# Altium PCB mach nhan tin hieu.PcbDoc (part 2 of 2)
Units mm, origin at the board's own origin, x right, y up, seen from the top; angles counter-clockwise.
Board outline 399.55 x 164.38 mm, 2 copper layers (Top Layer, Bottom Layer); 171 components, 209 nets, 595 pads, 30 vias.
Unrouted connection lines stored in the file: 1.
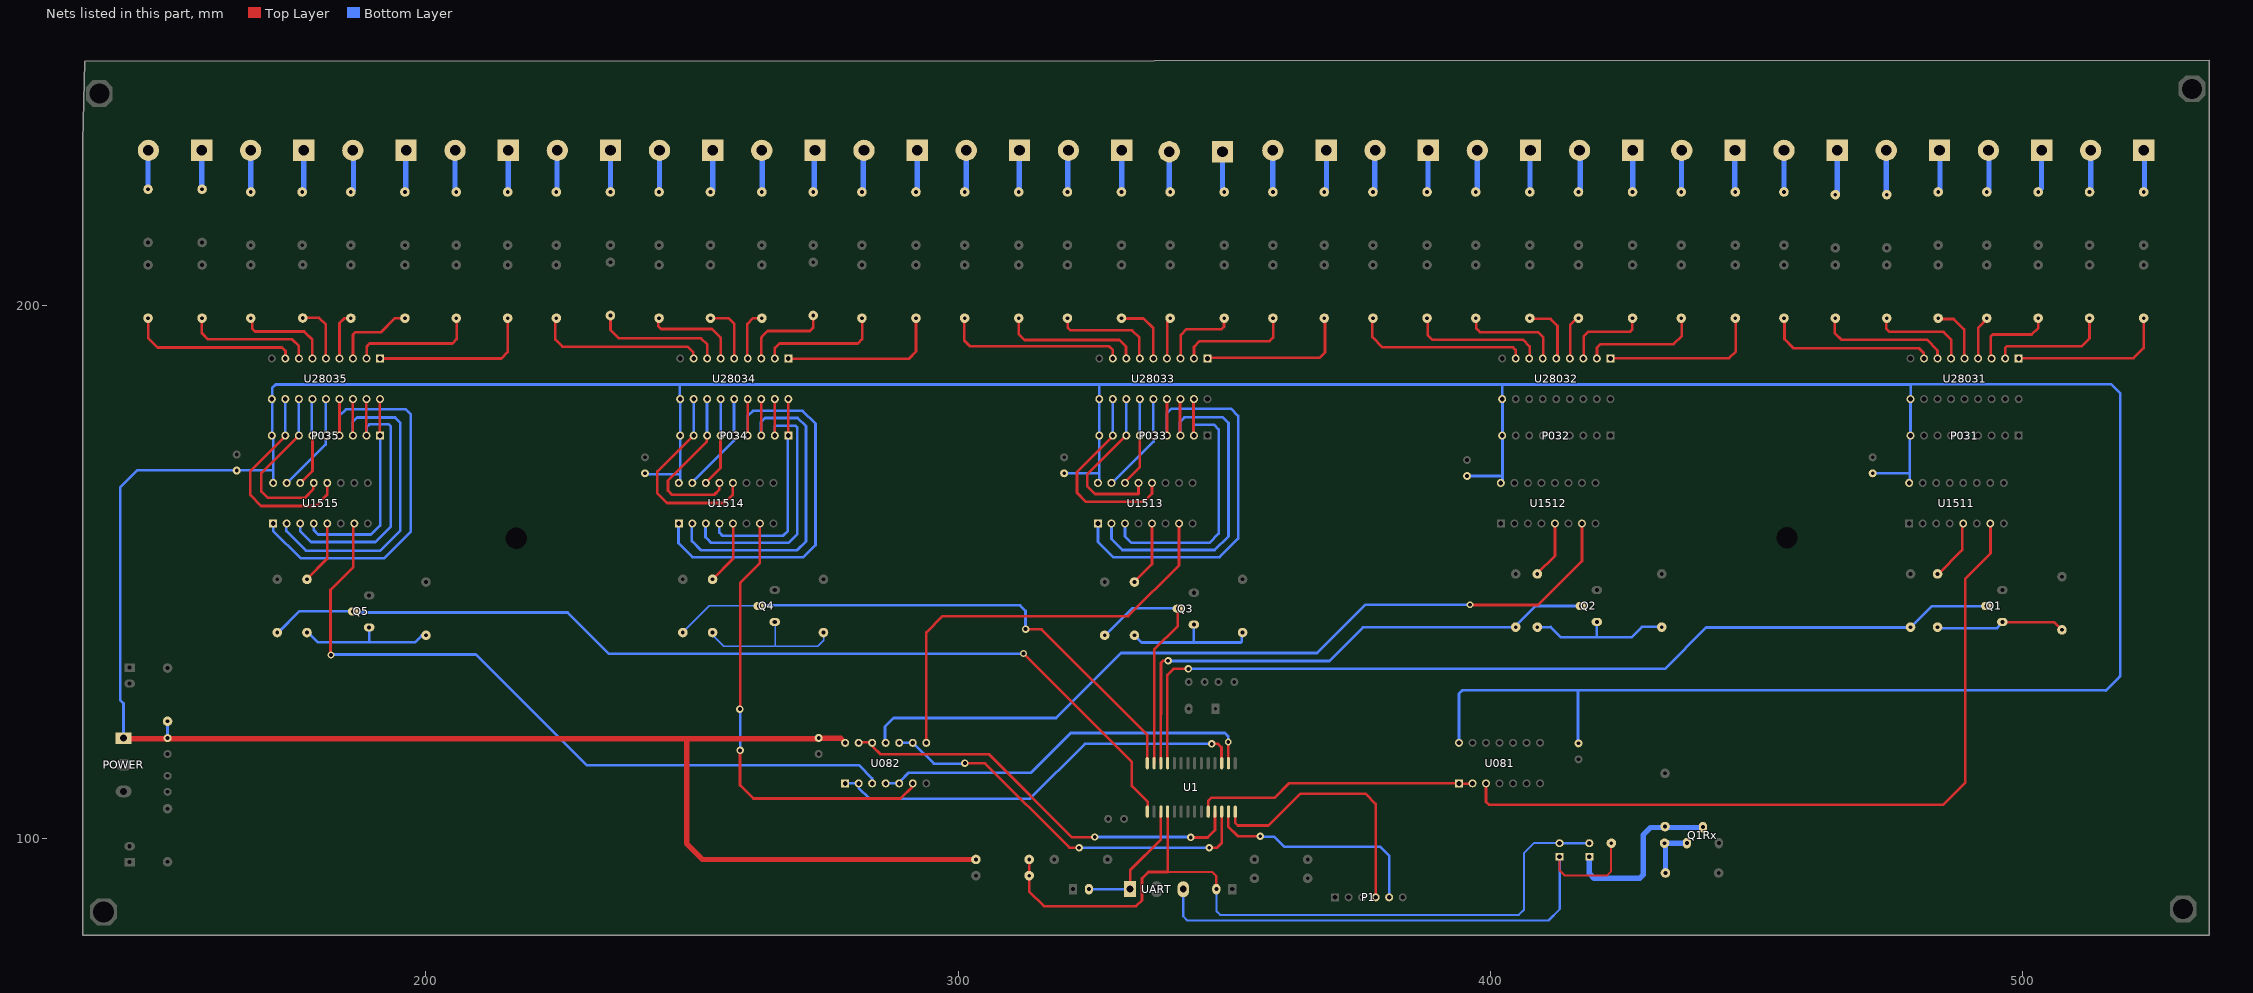
[diagram p2: the nets of this part, all layers, seen from the top]

## Via types
v1: diameter 1.4, hole 0.711, Top Layer to Bottom Layer, 20 vias
v2: diameter 1.27, hole 0.711, Top Layer to Bottom Layer, 9 vias
v3: diameter 1.4, hole 0.72, Top Layer to Bottom Layer, 1 vias

## Nets (pads, with @x,y where several pads share a name; then routed paths per layer and width w, separated by ;. In a path a pad name is that pad's centre, name@x,y a point inside that pad or via, vN(x,y) a via of type N, cw(c..) or ccw(c..) an arc to the next point about the centre after c; other vN are vias at no path point) (continued)
NetP033_2: P033.2 U1513.3 U28033.17 | length 54.9
  Top Layer w0.5: P033.2@344.225,175.675 344.225,182.497 U28033.17@344.225,182.725
  Bottom Layer w0.5: U1513.3@331.362,159.129 331.362,156.688 332.55,155.5 347.225,155.5 348.975,157.25 348.975,176.8 348.075,177.7 344.375,177.7 344.225,177.55 P033.2@344.225,175.675
NetP033_3: P033.3 U1513.2 U28033.16 | length 67.8
  Top Layer w0.254: P033.3@341.7,175.55 P033.3@341.775,175.475
  Top Layer w0.5: P033.3@341.7,175.55 341.7,175.639 341.7,182.497 U28033.16@341.7,182.725
  Bottom Layer w0.5: U1513.2@328.822,159.129 328.822,156.203 330.875,154.15 348.225,154.15 350.8,156.725 350.8,178.025 349.725,179.1 342.537,179.1 342.516,179.05 ; P033.3@341.7,175.55 341.7,175.639 341.7,178.2 342.425,178.925
NetP033_4: P033.4 U1513.1 U28033.15 | length 81
  Top Layer w0.5: P033.4@339.25,175.725 339.25,182.497 U28033.15@339.25,182.7
  Bottom Layer w0.5: U1513.1@326.282,159.129 326.282,155.668 329.15,152.8 349.125,152.8 352.625,156.3 352.625,179.325 351.25,180.7 340.05,180.7 ; P033.4@339.236,175.639 339.236,179.861 340.062,180.687
NetP033_5: P033.5 U1513.15 U28033.14 | length 19
  Bottom Layer w0.254: P033.5@336.625,175.675 336.643,175.693 P033.5@336.696,175.746
  Bottom Layer w0.5: U1513.15@329.05,166.8 336.75,174.5 336.75,175.639 P033.5@336.75,175.725 ; P033.5@336.696,175.746 U28033.14@336.696,182.497
NetP033_6: P033.6 U1513.14 U28033.13 | length 16.8
  Top Layer w0.5: U1513.14@331.25,166.85 331.255,166.855 334.156,169.756 P033.6@334.156,175.639
  Bottom Layer w0.254: P033.6@334.075,175.75 P033.6@334.156,175.831
  Bottom Layer w0.5: P033.6@334.156,175.831 U28033.13@334.156,182.497
NetP033_7: P033.7 U1513.13 U28033.12 | length 31.7
  Top Layer w0.5: P033.7@331.6,175.675 331.59,175.665 324.25,168.325 324.25,166.2 325.775,164.675 333.902,164.675 U1513.13@333.902,166.749
  Bottom Layer w0.254: P033.7@331.616,175.784 331.688,175.712 P033.7@331.725,175.675
  Bottom Layer w0.5: P033.7@331.616,175.784 U28033.12@331.616,182.497
NetP033_8: P033.8 U1513.12 U28033.11 | length 37.5
  Top Layer w0.5: P033.8@329.05,175.5 322.35,168.8 322.35,164.9 324.05,163.2 334.9,163.2 336.442,164.742 U1513.12@336.442,166.749
  Bottom Layer w0.254: U28033.11@329,182.325 U28033.11@329.076,182.249
  Bottom Layer w0.5: P033.8@329.076,175.639 U28033.11@329.076,182.249
NetP034_1: P034.1 U1514.4 U28034.18 | length 40.1
  Top Layer w0.254: P034.1@268.1,175.575 P034.1@268.116,175.591
  Top Layer w0.5: P034.1@268.116,175.591 P034.1@268.116,175.639 U28034.18@268.116,182.497
  Bottom Layer w0.5: U1514.4@255.162,159.275 U1514.4@255.162,159.129 255.162,157.438 255.775,156.825 267.1,156.825 268.025,157.75 268.025,175.5 P034.1@268.1,175.575
NetP034_2: P034.2 U1514.3 U28034.17 | length 54
  Top Layer w0.254: P034.2@265.576,175.599 P034.2@265.75,175.425
  Top Layer w0.5: P034.2@265.576,175.599 P034.2@265.576,175.639 U28034.17@265.576,182.497
  Bottom Layer w0.254: 265.576,177.326 265.725,177.475
  Bottom Layer w0.5: U1514.3@252.55,159.075 252.55,156.55 253.375,155.725 ; 253.45,155.65 253.6,155.5 268.175,155.5 269.8,157.125 269.8,177.15 269.5,177.45 ; P034.2@265.576,175.599 P034.2@265.576,175.639 265.576,177.326 ; 265.725,177.475 269.425,177.475
NetP034_3: P034.3 U1514.2 U28034.16 | length 66.5
  Top Layer w0.254: P034.3@262.95,175.75 P034.3@263.036,175.836
  Top Layer w0.5: P034.3@263.036,175.836 U28034.16@263.036,182.497
  Bottom Layer w0.5: U1514.2@250,159.3 250,159.129 250,155.85 251.75,154.1 269.75,154.1 271.425,155.775 271.425,174.25 ; P034.3@262.975,175.575 262.975,175.639 262.975,178.15 263.775,178.95 269.875,178.95 271.425,177.4 271.425,174.4
NetP034_4: P034.4 U1514.1 U28034.15 | length 79.1
  Top Layer w0.254: P034.4@260.475,175.5 P034.4@260.496,175.521
  Top Layer w0.5: P034.4@260.496,175.521 P034.4@260.496,175.639 U28034.15@260.496,182.497
  Bottom Layer w0.5: U1514.1@247.475,159 247.475,155.425 250.1,152.8 270.95,152.8 273.225,155.075 ; P034.4@260.525,175.575 260.525,175.639 260.525,179.375 261.45,180.3 270.8,180.3 273.225,177.875 273.225,155.075 ; 273.225,155.025 273.225,155.075 ; 273.25,155.1 273.225,155.075
NetP034_5: P034.5 U1514.15 U28034.14 | length 18.9
  Bottom Layer w0.5: U1514.15@249.975,166.75 250.028,166.803 257.925,174.7 257.925,175.639 U28034.14@257.925,182.4
NetP034_6: P034.6 U1514.14 U28034.13 | length 16.9
  Top Layer w0.254: P034.6@255.5,175.425 P034.6@255.6,175.425
  Top Layer w0.5: U1514.14@252.575,166.75 252.598,166.773 255.375,169.55 P034.6@255.375,175.55
  Bottom Layer w0.5: P034.6@255.416,175.616 P034.6@255.416,175.639 U28034.13@255.416,182.497
NetP034_7: P034.7 U1514.13 U28034.12 | length 31.9
  Top Layer w0.5: P034.7@252.825,175.45 252.825,174.5 245.525,167.2 245.525,165.3 246.3,164.525 254.2,164.525 255.162,165.487 U1514.13@255.162,166.749
  Bottom Layer w0.5: P034.7@252.85,175.675 252.85,182.497 U28034.12@252.85,182.8
NetP034_8: P034.8 U1514.12 U28034.11 | length 38.4
  Top Layer w0.5: P034.8@250.375,175.775 250.288,175.687 243.5,168.9 243.5,164.8 245.325,162.975 256.15,162.975 257.65,164.475 U1514.12@257.65,166.65
  Bottom Layer w0.5: P034.8@250.336,175.611 P034.8@250.336,175.639 U28034.11@250.336,182.497
NetP035_1: P035.1 U1515.4 U28035.18 | length 38.3
  Top Layer w0.5: P035.1@191.35,175.625 191.35,175.639 U28035.18@191.35,182.475
  Bottom Layer w0.5: U1515.4@178.962,159.129 178.962,157.863 179.775,157.05 ; 179.875,157.05 189.725,157.05 191.425,158.75 ; 191.433,158.725 P035.1@191.433,175.5
NetP035_2: P035.2 U1515.3 U28035.17 | length 52.8
  Top Layer w0.5: P035.2@188.85,175.6 188.85,175.639 U28035.17@188.85,182.425
  Bottom Layer w0.254: 193.425,177.4 193.45,177.375
  Bottom Layer w0.5: U1515.3@176.422,159.129 176.422,157.678 178.45,155.65 190.575,155.65 193.45,158.525 193.45,177.375 ; P035.2@188.875,175.575 188.875,175.639 188.875,177.225 189.4,177.75 193.075,177.75 193.425,177.4
NetP035_3: P035.3 U1515.2 U28035.16 | length 65.2
  Top Layer w0.5: P035.3@186.275,175.7 U28035.16@186.275,182.45
  Bottom Layer w0.5: U1515.2@173.8,159 173.8,157.725 177.5,154.025 191.475,154.025 195.2,157.75 195.2,178.075 194.25,179.025 187.075,179.025 186.275,178.225 186.275,175.639 P035.3@186.275,175.55
NetP035_4: P035.4 U1515.1 U28035.15 | length 78.2
  Top Layer w0.5: P035.4@183.788,175.662 U28035.15@183.788,182.497
  Bottom Layer w0.254: P035.4@183.75,175.75 183.824,175.676 P035.4@183.85,175.65 ; 197.1,179.725 197.175,179.65
  Bottom Layer w0.5: U1515.1@171.35,159.025 171.35,157.75 176.462,152.638 ; 176.5,152.575 192.2,152.575 197.175,157.55 197.175,179.65 ; P035.4@183.75,175.75 183.75,179.325 185,180.575 196.25,180.575 197.1,179.725
NetP035_5: P035.5 U1515.15 U28035.14 | length 18.9
  Bottom Layer w0.5: U1515.15@173.925,166.675 173.94,166.69 181.2,173.95 181.2,175.639 181.2,182.497 U28035.14@181.2,182.575
NetP035_6: P035.6 U1515.14 U28035.13 | length 16.7
  Top Layer w0.5: U1515.14@176.4,166.675 176.448,166.723 178.725,169 178.725,175.639 P035.6@178.725,175.7
  Bottom Layer w0.5: P035.6@178.6,175.75 U28035.13@178.6,182.425
NetP035_7: P035.7 U1515.13 U28035.12 | length 32.4
  Top Layer w0.5: P035.7@176.15,175.65 169.125,168.625 169.125,165.15 170.325,163.95 177.275,163.95 178.9,165.575 U1515.13@178.9,166.675
  Bottom Layer w0.5: P035.7@176.168,175.507 P035.7@176.168,175.639 U28035.12@176.168,182.497
NetP035_8: P035.8 U1515.12 U28035.11 | length 39
  Top Layer w0.5: P035.8@173.65,175.55 167.05,168.95 167.05,164.45 169.075,162.425 179.35,162.425 181.502,164.577 U1515.12@181.502,166.749
  Bottom Layer w0.5: P035.8@173.628,175.647 U28035.11@173.628,182.497
NetPI1_1: IN1.1 PI1.1 | length 7.4
  Bottom Layer w1: IN1.1@522.9,221.775 PI1.1@522.9,229.2
NetPI1_2: IN2.1 PI1.2 | length 7.6
  Bottom Layer w1: IN2.1@512.78,221.63 PI1.2@512.78,229.221
NetPI2_1: IN3.1 PI2.1 | length 7.3
  Bottom Layer w1: 503.55,222.075 503.55,229.221 PI2.1@503.55,229.4
NetPI2_2: IN4.1 PI2.2 | length 7.9
  Bottom Layer w1: IN4.1@493.675,221.525 493.675,229.221 PI2.2@493.675,229.4
NetPI3_1: IN5.1 PI3.1 | length 7.3
  Bottom Layer w1: IN5.1@484.475,221.775 PI3.1@484.475,229.1
NetPI3_2: IN6.1 PI3.2 | length 8
  Bottom Layer w1: IN6.1@474.372,221.203 PI3.2@474.372,229.221
NetPI4_1: IN7.1 PI4.1 | length 8.1
  Bottom Layer w1: IN7.1@465.168,221.168 PI4.1@465.168,229.221
NetPI4_2: IN8.1 PI4.2 | length 7.7
  Bottom Layer w1: IN8.1@455.168,221.557 PI4.2@455.168,229.221
NetPI5_1: IN9.1 PI5.1 | length 7.9
  Bottom Layer w1: IN9.1@445.925,221.425 445.925,229.221 PI5.1@445.925,229.35
NetPI5_2: IN10.1 PI5.2 | length 7.7
  Bottom Layer w1: IN10.1@435.9,221.625 435.9,229.221 PI5.2@435.9,229.35
NetPI6_1: IN11.1 PI6.1 | length 7.9
  Bottom Layer w1: IN11.1@426.75,221.525 426.75,229.221 PI6.1@426.75,229.4
NetPI6_2: IN12.1 PI6.2 | length 7.6
  Bottom Layer w1: IN12.1@416.875,221.625 416.875,229.221 PI6.2@416.875,229.25
NetPI7_1: IN13.1 PI7.1 | length 7.6
  Bottom Layer w1: IN13.1@407.45,221.675 407.45,229.221 PI7.1@407.45,229.25
NetPI7_2: IN14.1 PI7.2 | length 7.4
  Bottom Layer w1: IN14.1@397.556,221.806 PI7.2@397.556,229.221
NetPI8_1: IN15.1 PI8.1 | length 7.8
  Bottom Layer w1: IN15.1@388.3,221.575 388.3,229.221 PI8.1@388.3,229.35
NetPI8_2: IN16.1 PI8.2 | length 7.8
  Bottom Layer w1: IN16.1@378.275,221.575 378.275,229.221 PI8.2@378.275,229.35
NetPI9_1: IN17.1 PI9.1 | length 7.3
  Bottom Layer w1: IN17.1@369.225,221.975 369.225,229.221 PI9.1@369.225,229.3
NetPI9_2: IN18.1 PI9.2 | length 7.8
  Bottom Layer w1: IN18.1@359.15,221.525 359.15,229.221 PI9.2@359.15,229.35
NetPI10_1: IN19.1 PI10.1 | length 7.3
  Bottom Layer w1: IN19.1@349.675,221.825 349.675,228.967 PI10.1@349.675,229.1
NetPI10_2: IN20.1 PI10.2 | length 7.3
  Bottom Layer w1: IN20.1@339.679,221.646 PI10.2@339.679,228.967
NetPI11_1: IN21.1 PI11.1 | length 7.6
  Bottom Layer w1: IN21.1@330.74,221.64 PI11.1@330.74,229.221
NetPI11_2: IN22.1 PI11.2 | length 7.7
  Bottom Layer w1: IN22.1@320.6,221.625 320.6,229.221 PI11.2@320.6,229.35
NetPI12_1: IN23.1 PI12.1 | length 7.9
  Bottom Layer w1: IN23.1@311.5,221.525 311.5,229.221 PI12.1@311.5,229.45
NetPI12_2: IN24.1 PI12.2 | length 7.3
  Bottom Layer w1: IN24.1@301.535,221.885 PI12.2@301.535,229.221
NetPI13_1: IN25.1 PI13.1 | length 7.6
  Bottom Layer w1: IN25.1@292.331,221.656 PI13.1@292.331,229.221
NetPI13_2: IN26.1 PI13.2 | length 7.6
  Bottom Layer w1: IN26.1@282.175,221.675 282.175,229.221 PI13.2@282.175,229.25
NetPI14_1: IN27.1 PI14.1 | length 7.5
  Bottom Layer w1: IN27.1@273,221.875 273,229.221 PI14.1@273,229.4
NetPI14_2: IN28.1 PI14.2 | length 7.7
  Bottom Layer w1: IN28.1@263.25,221.475 PI14.2@263.25,229.15
NetPI15_1: IN29.1 PI15.1 | length 7.3
  Bottom Layer w1: IN29.1@253.923,221.923 PI15.1@253.923,229.221
NetPI15_2: IN30.1 PI15.2 | length 7.8
  Bottom Layer w1: IN30.1@243.923,221.402 243.923,221.408 PI15.2@243.923,229.221
NetPI16_1: IN31.1 PI16.1 | length 7.8
  Bottom Layer w1: IN31.1@234.719,221.469 PI16.1@234.719,229.221
NetPI16_2: IN32.1 PI16.2 | length 7.8
  Bottom Layer w1: IN32.1@224.65,221.475 224.65,229.221 PI16.2@224.65,229.3
NetPI17_1: IN33.1 PI17.1 | length 7.6
  Bottom Layer w1: IN33.1@215.5,221.7 215.5,229.221 PI17.1@215.5,229.35
NetPI17_2: IN34.1 PI17.2 | length 7.7
  Bottom Layer w1: IN34.1@205.515,221.535 PI17.2@205.515,229.221
NetPI18_1: IN35.1 PI18.1 | length 7.4
  Bottom Layer w1: IN35.1@196.25,221.675 PI18.1@196.25,229.1
NetPI18_2: IN36.1 PI18.2 | length 7.4
  Bottom Layer w1: IN36.1@186.425,221.825 186.425,229.221 PI18.2@186.425,229.25
NetPI19_1: IN37.1 PI19.1 | length 7.6
  Bottom Layer w1: IN37.1@177.1,221.725 177.1,229.221 PI19.1@177.1,229.35
NetPI19_2: IN38.1 PI19.2 | length 7.8
  Bottom Layer w1: IN38.1@167.107,221.408 PI19.2@167.107,229.221
NetPI20_1: IN39.1 PI20.1 | length 7.1
  Bottom Layer w1: IN39.1@157.903,222.097 PI20.1@157.903,229.221
NetPI20_2: IN40.1 PI20.2 | length 7.2
  Bottom Layer w1: IN40.1@147.828,221.916 PI20.2@147.828,229.128
NetQ1_3: Q1.3 R1512.1 R15121.1 | length 24.2
  Top Layer w0.5: Q1.3@496.075,140.6 496.2,140.6 505.925,140.6 R15121.1@507.225,139.3
  Bottom Layer w0.5: R1512.1@484.175,139.475 495.2,139.475 Q1.3@496.225,140.5
NetQ1Rx_3: Q1Rx.3 RD6.2 Rx5.2 | length 9.9
  Bottom Layer w1: Rx5.2@432.725,99.1 432.751,99.075 Rx5.2@432.765,99.06 ; Rx5.2@432.736,99.06 Rx5.2@432.765,99.06 ; RD6.2@432.896,93.472 432.896,98.929 Rx5.2@432.765,99.06 ; Q1Rx.3@436.95,99.075 436.935,99.06 436.92,99.06 Rx5.2@432.765,99.06
NetQ2_3: Q2.3 R1514.1 R15122.1 | length 27.7
  Bottom Layer w0.5: R1514.1@408.832,139.651 411.276,139.651 ; 411.325,139.7 413.3,137.725 426.525,137.725 428.5,139.7 R15122.1@432.075,139.7 ; 420,137.775 Q2.3@420,140.627
NetQ3_3: Q3.3 R1516.1 R15123.1 | length 25.4
  Bottom Layer w0.254: 343.625,136.775 343.675,136.825 ; 353.1,136.775 353.275,136.95
  Bottom Layer w0.5: R1516.1@333.15,138.1 334.475,136.775 344.308,136.775 ; Q3.3@344.308,140.119 344.308,136.775 ; 353.1,136.775 344.308,136.775 ; 353.275,136.95 R15123.1@353.275,138.175
NetQ4_3: Q4.3 R1518.1 R15124.1 | length 27.9
  Bottom Layer w0.254: R1518.1@253.975,138.075 255.95,136.1 265.7,136.1 ; Q4.3@265.7,140.55 265.7,136.175 265.85,136.025 273.625,136.025 274.8,137.2 R15124.1@274.8,138.525
NetQ5_3: Q5.3 R15110.1 R15125.1 | length 25.2
  Bottom Layer w0.254: R15110.1@178.375,138.2 178.375,138.635 R15110.1@178.375,138.7 ; 189.368,136.957 189.45,136.875
  Bottom Layer w0.5: R15110.1@178.375,138.2 179.775,136.8 197.975,136.8 R15125.1@199.2,138.025 ; 189.368,136.957 Q5.3@189.368,139.611
NetR1512_2: R1512.2 U1511.5 | length 11.3
  Top Layer w0.5: R1512.2@484.075,149.575 484.083,149.583 488.625,154.125 U1511.5@488.625,159
NetR1514_2: R1514.2 U1512.5 | length 10.8
  Top Layer w0.5: R1514.2@408.8,149.725 412.134,153.059 U1512.5@412.134,159.129
NetR1516_2: R1516.2 U1513.5 | length 12.3
  Top Layer w0.5: R1516.2@333.15,148.2 336.442,151.492 U1513.5@336.442,159.129
NetR1518_2: R1518.2 U1514.5 | length 12.1
  Top Layer w0.5: R1518.2@253.825,148.575 253.888,148.638 257.75,152.5 U1514.5@257.75,159
NetR15110_2: R15110.2 U1515.5 | length 12
  Top Layer w0.5: R15110.2@177.675,148.725 181.502,152.552 U1515.5@181.502,159.129
NetR42802_1: R42802.1 U28032.4 | length 8.3
  Top Layer w0.5: U28032.4@415.025,190.2 415.025,196.475 R42802.1@416.475,197.925
NetR42803_1: R42803.1 U28033.4 | length 7.8
  Top Layer w0.5: U28033.4@339.236,190.117 339.275,190.156 339.275,197.05 R42803.1@339.85,197.625
NetR42804_1: R42804.1 U28034.4 | length 9.8
  Top Layer w0.5: U28034.4@260.425,190.075 260.425,190.117 260.425,196.625 261.5,197.7 263.144,197.7 R42804.1@263.225,197.7
NetR128031_1: R128031.1 U28031.1 | length 29.9
  Top Layer w0.5: U28031.1@499.25,190.2 499.256,190.2 520.825,190.2 522.725,192.1 522.725,197.692 R128031.1@522.725,197.7
NetR128032_1: R128032.1 U28032.1 | length 30.2
  Top Layer w0.5: U28032.1@422.625,190.2 444.875,190.2 446.125,191.45 R128032.1@446.125,197.675
NetR128033_1: R128033.1 U28033.1 | length 29
  Top Layer w0.5: U28033.1@346.75,190.25 346.856,190.25 367.925,190.25 368.95,191.275 R128033.1@368.95,197.65
NetR128034_1: R128034.1 U28034.1 | length 31
  Top Layer w0.5: U28034.1@268.075,190.225 268.149,190.151 268.225,190.075 290.75,190.075 292.1,191.425 R128034.1@292.1,197.692 R128034.1@292.1,197.75
NetR128035_1: R128035.1 U28035.1 | length 30.9
  Top Layer w0.5: U28035.1@191.408,190.117 214.192,190.117 215.392,191.317 R128035.1@215.392,197.692
NetR228031_1: R228031.1 U28031.2 | length 22.3
  Top Layer w0.5: U28031.2@496.716,190.117 496.716,192.066 497.1,192.45 511.125,192.45 512.575,193.9 R228031.1@512.575,197.675
NetR228032_1: R228032.1 U28032.2 | length 22.2
  Top Layer w0.254: 420,192.15 420.05,192.1
  Top Layer w0.5: 420,192.15 420.675,192.825 434.425,192.825 435.975,194.375 435.975,197.392 R228032.1@435.769,197.598 ; U28032.2@420.05,190.2 420.05,192.1
NetR228033_1: R228033.1 U28033.2 | length 21.4
  Top Layer w0.5: 344.3,192.3 345.375,193.375 358.5,193.375 359.2,194.075 359.2,197.692 R228033.1@359.2,197.75 ; U28033.2@344.316,190.117 344.316,192.209
NetR228034_1: R228034.1 U28034.2 | length 22.9
  Top Layer w0.5: U28034.2@265.576,190.117 265.576,192.075 ; 265.625,192.125 266.45,192.95 281.2,192.95 282,193.75 R228034.1@282,197.675
NetR228035_1: R228035.1 U28035.2 | length 23.8
  Top Layer w0.5: 188.925,192.425 189.425,192.925 205,192.925 205.825,193.75 205.825,197.692 R228035.1@205.825,197.7 ; U28035.2@188.95,190.025 188.95,190.117 188.95,192.425
NetR328031_1: R328031.1 U28031.3 | length 15.8
  Top Layer w0.5: U28031.3@494.025,189.95 494.025,190.117 494.025,194.275 494.375,194.625 501.7,194.625 502.95,195.875 502.95,197.692 R328031.1@502.95,197.725
NetR328032_1: R328032.1 U28032.3 | length 16.1
  Top Layer w0.254: 417.55,194.3 417.7,194.45
  Top Layer w0.5: U28032.3@417.55,189.975 417.55,190.117 417.55,194.3 ; 417.7,194.45 418.375,195.125 426.2,195.125 426.65,195.575 R328032.1@426.65,197.675
NetR328033_1: R328033.1 U28033.3 | length 15.1
  Top Layer w0.5: U28033.3@341.825,189.95 341.825,190.117 341.825,194.525 ; 341.85,194.575 342.9,195.625 349.525,195.625 349.975,196.075 349.975,197.692 R328033.1@349.975,197.825
NetR328034_1: R328034.1 U28034.3 | length 16.8
  Top Layer w0.5: U28034.3@263.036,190.117 263.036,193.986 263.1,194.05 263.1,194.175 264.225,195.3 272.15,195.3 272.8,195.95 272.8,198.2 R328034.1@272.8,198.275
NetR328035_1: R328035.1 U28035.3 | length 15.5
  Top Layer w0.5: U28035.3@186.328,190.117 186.328,194.628 186.75,195.05 191.55,195.05 194.175,197.675 R328035.1@196.025,197.675
NetR428031_1: R428031.1 U28031.4 | length 8.3
  Top Layer w0.5: U28031.4@491.675,190.025 491.675,195.925 R428031.1@493.35,197.6
NetR428035_1: R428035.1 U28035.4 | length 9.2
  Top Layer w0.5: U28035.4@183.788,190.117 183.788,196.763 184.71,197.685 185.928,197.685 185.935,197.685 R428035.1@185.95,197.7
NetR528031_1: R528031.1 U28031.5 | length 11.1
  Top Layer w0.5: R528031.1@484.15,197.55 487.05,197.55 489,195.6 U28031.5@489,190.15
NetR528032_1: R528032.1 U28032.5 | length 11.7
  Top Layer w0.5: R528032.1@407.5,197.575 411.3,197.575 412.625,196.25 U28032.5@412.625,190.2
NetR528033_1: R528033.1 U28033.5 | length 12.5
  Top Layer w0.5: R528033.1@330.65,197.65 330.708,197.65 334.85,197.65 336.696,195.804 U28033.5@336.696,190.117
NetR528034_1: R528034.1 U28034.5 | length 11.4
  Top Layer w0.5: R528034.1@253.5,197.675 256.95,197.675 257.956,196.669 U28034.5@257.956,190.117
NetR528035_1: R528035.1 U28035.5 | length 11.4
  Top Layer w0.5: R528035.1@176.75,197.75 176.898,197.75 179.975,197.75 181.248,196.477 U28035.5@181.248,190.117
NetR628031_1: R628031.1 U28031.6 | length 18.5
  Top Layer w0.254: 486.525,193.725 486.575,193.675
  Top Layer w0.5: R628031.1@474.35,197.525 474.35,195.725 474.95,195.125 485.125,195.125 486.525,193.725 ; U28031.6@486.575,190.025 486.575,190.117 486.575,193.675
NetR628032_1: R628032.1 U28032.6 | length 18.9
  Top Layer w0.254: 409.95,193 410,193.05
  Top Layer w0.5: R628032.1@397.375,197.525 397.375,195.725 398.025,195.075 408.975,195.075 409.925,194.125 409.925,193.125 ; U28032.6@409.95,190.15 409.95,193
NetR628033_1: R628033.1 U28033.6 | length 20
  Top Layer w0.5: R628033.1@320.625,197.65 320.625,195.875 321.1,195.4 332.725,195.4 334.05,194.075 334.05,190.35 334.219,190.181 U28033.6@334.3,190.1
NetR628034_1: R628034.1 U28034.6 | length 17.9
  Top Layer w0.5: R628034.1@243.7,197.625 243.7,196.15 244.2,195.65 253.75,195.65 255.375,194.025 ; U28034.6@255.416,190.117 255.416,193.975
NetR628035_1: R628035.1 U28035.6 | length 17.6
  Top Layer w0.5: R628035.1@167.4,197.675 167.4,195.75 167.95,195.2 177.15,195.2 178.708,193.642 U28035.6@178.708,190.117
NetR728031_1: R728031.1 U28031.7 | length 24.9
  Top Layer w0.254: 483.925,191.725 484.016,191.634
  Top Layer w0.5: R728031.1@464.7,197.6 464.714,197.586 464.714,194.861 465.925,193.65 482,193.65 483.925,191.725 ; U28031.7@484.016,190.117 484.016,191.634
NetR728032_1: R728032.1 U28032.7 | length 25.5
  Top Layer w0.5: R728032.1@388.225,197.525 388.225,194.5 389.075,193.65 406.1,193.65 407.375,192.375 407.375,190.117 U28032.7@407.375,189.975
NetR728033_1: R728033.1 U28033.7 | length 26.5
  Top Layer w0.5: R728033.1@311.4,197.625 311.4,194.7 312.5,193.6 330.325,193.6 331.55,192.375 331.55,190.117 U28033.7@331.55,189.9
NetR728034_1: R728034.1 U28034.7 | length 24.8
  Top Layer w0.5: R728034.1@234.7,198.2 234.7,195.475 236.275,193.9 251.75,193.9 252.9,192.75 252.9,190.117 U28034.7@252.9,190
NetR728035_1: R728035.1 U28035.7 | length 24.4
  Top Layer w0.5: R728035.1@157.925,197.7 157.925,197.692 157.925,194.925 159.125,193.725 174.925,193.725 176.168,192.482 U28035.7@176.168,190.117
NetR828031_1: R828031.1 U28031.8 | length 32.4
  Top Layer w0.5: R828031.1@455.25,197.65 455.25,193.75 456.95,192.05 480.525,192.05 481.425,191.15 U28031.8@481.425,190.15
  Bottom Layer w0.5: U28031.8@481.475,190.05 481.509,190.084 U28031.8@481.625,190.2
NetR828032_1: R828032.1 U28032.8 | length 33
  Top Layer w0.5: R828032.1@377.842,197.583 377.842,194.158 379.775,192.225 404.275,192.225 404.75,191.75 U28032.8@404.75,190.117
  Bottom Layer w0.5: R828032.1@377.825,197.6 R828032.1@377.842,197.583 ; U28032.8@404.75,190.117 404.75,190.1 U28032.8@404.775,190.075
NetR828033_1: R828033.1 U28033.8 | length 34.4
  Top Layer w0.5: R828033.1@301.151,197.599 301.151,193.549 302.275,192.425 328.4,192.425 329.092,191.733 U28033.8@329.092,190.133
  Bottom Layer w0.5: R828033.1@301.15,197.6 R828033.1@301.151,197.599 ; U28033.8@329.092,190.133 U28033.8@329.15,190.075
NetR828034_1: R828034.1 U28034.8 | length 32.1
  Top Layer w0.5: R828034.1@224.35,197.4 224.35,193.675 225.675,192.35 249.2,192.35 250.272,191.278 U28034.8@250.272,190.117
  Bottom Layer w0.5: U28034.8@250.272,190.117 250.272,190.053 250.336,189.989 U28034.8@250.336,190.117
NetR828035_1: R828035.1 U28035.8 | length 32
  Top Layer w0.5: R828035.1@147.85,197.692 147.85,193.95 149.6,192.2 173,192.2 173.65,191.55 U28035.8@173.65,190.117
  Bottom Layer w0.5: R828035.1@147.85,197.692 R828035.1@147.85,197.7
PGC: P1.5 U1.27 | length 43.1
  Top Layer w0.5: U1.27@350.75,104.825 350.75,102.175 352.55,100.375 v1(356.775,100.375) v1@356.85,100.45
  Bottom Layer w0.254: v1@356.875,100.25 356.875,100.375 v1@356.875,100.425
  Bottom Layer w0.5: v1@356.875,100.25 359.425,100.25 361.3,98.375 379.325,98.375 381.038,96.662 P1.5@381.038,88.938
PGD: P1.4 U1.28 | length 49.5
  Top Layer w0.4: U1.28@352.072,104.995 352.072,102.853 352.525,102.4
  Top Layer w0.5: 352.525,102.4 358.325,102.4 364.3,108.375 376.525,108.375 378.46,106.44 P1.4@378.46,88.9
RX: DRX.2 PRX.2 PRXD.2 Rx21.1 Rx33.2 U1.18 | length 147.6
  Top Layer w0.4: 339.35,99.4 339.4,99.4 ; 339.475,93.625 347.8,93.625 348.52,92.905 DRX.2@348.52,90.424
  Top Layer w0.5: Rx21.1@313.35,96.05 313.35,96.012 313.35,92.964 313.35,90.025 316.15,87.225 333.475,87.225 334.55,88.3 334.55,92.45 335.762,93.662 339.4,93.662 ; 339.4,93.7 339.4,99.4 U1.18@339.4,104.7
  Bottom Layer w0.4: DRX.2@348.525,90.424 348.525,86.325 349.25,85.6 405.35,85.6 406.35,86.6 406.35,97.25 408.225,99.125 PRX.2@413.004,99.125 ; PRX.2@413.004,99.06 PRXD.2@418.592,99.06
  Bottom Layer w1: DRX.2@348.525,90.424 DRX.2@348.525,90.45 ; PRX.2@413.004,99.125 PRX.2@413.1,99.125
RX1: PRXD.1 Q1Rx.2 RD2.2 | length 33.3
  Bottom Layer w1: PRXD.1@418.592,96.52 418.592,93.358 419.5,92.45 428.05,92.45 428.7,93.1 428.7,100.575 430.125,102 432.816,102 439.92,102 Q1Rx.2@439.975,102
RX_D: PRX.1 Rx5.1 UART.3 | length 105.1
  Top Layer w0.4: PRX.1@413.004,96.52 413.004,93.996 414.025,92.975 421.85,92.975 422.7,93.825 Rx5.1@422.7,99.06
  Top Layer w1: Rx5.1@422.7,99.06 Rx5.1@422.7,99.075
  Bottom Layer w0.4: UART.3@342.312,90.424 342.312,85.313 343.075,84.55 410.925,84.55 413.05,86.675 PRX.1@413.05,96.52
  Bottom Layer w1: PRX.1@413.05,96.52 PRX.1@413.05,96.525
STB1: U081.3 U1511.7 | length 145.9
  Top Layer w0.5: U081.3@399.189,110.307 399.189,106.839 399.728,106.3 485.1,106.3 489.2,110.4 489.2,148.725 493.95,153.475 U1511.7@493.95,158.925
STB1P: U1.24 U081.1 U081.2 | length 52.9
  Top Layer w0.254: U081.1@394.075,110.1 U081.1@394.075,110.25
  Top Layer w0.5: U1.24@347,105.225 347,106.975 ; 347.05,107.075 347.55,107.575 359.45,107.575 362.2,110.325 U081.1@394.025,110.325 ; U081.1@394.225,110.25 396.649,110.25 U081.2@396.9,110.25
STB2: U082.11 U1512.7 | length 153.6
  Top Layer w0.5: v2@396.737,143.8 408.95,143.8 417.214,152.064 U1512.7@417.214,159.129
  Bottom Layer w0.254: U082.11@286.425,118.2 U082.11@286.5,118.125
  Bottom Layer w0.5: U082.11@286.275,117.9 286.275,117.927 286.275,120.975 287.875,122.575 318.425,122.575 330.65,134.8 367.475,134.8 376.55,143.875 v2(396.2,143.875)
STB2P: U1.25 U082.12 U082.13 | length 78.6
  Top Layer w0.254: U082.12@283.825,118.025 283.898,117.952 U082.12@283.9,117.95
  Top Layer w0.5: U082.13@281.15,118.025 281.333,118.025 U082.12@283.825,118.025 ; U082.12@284,117.925 284,117.175 285.4,115.775 305.825,115.775 321.425,100.175 v1@325.5,100.175 ; v1(343.7,100.15) 346.9,100.15 348.262,101.512 U1.25@348.262,104.995
  Bottom Layer w0.5: v1@325.825,100.225 v1@343.7,100.225
  other v1: 325.7,100.225
STB3: U082.8 U1513.7 | length 81.3
  Top Layer w0.5: U082.8@294.033,117.927 294.033,138.658 297.1,141.725 331.975,141.725 341.587,151.338 ; 341.522,151.325 U1513.7@341.522,159.129
STB3P: U1.26 U082.9 U082.10 | length 75.2
  Top Layer w0.254: U082.9@291.477,117.927 291.485,117.935 U082.9@291.575,118.025 ; v1@301.3,114.25 301.362,114.187 v1@301.475,114.075 ; v1@322.725,98.225 v1(322.75,98.2)
  Top Layer w0.5: v1@301.475,114.075 305.075,114.075 320.925,98.225 v1@322.725,98.225 ; v1@347.2,98.225 348.7,98.225 349.532,99.057 U1.26@349.532,104.995
  Bottom Layer w0.254: U082.9@291.227,117.927 U082.9@291.325,118.025 ; v1(347.2,98.2) v1@347.25,98.15
  Bottom Layer w0.5: U082.10@288.953,117.927 U082.9@291.227,117.927 ; U082.9@291.55,117.9 295.45,114 301.3,114 v1@301.35,114 ; v1(322.75,98.2) v1(347.2,98.2)
  other v1: 301.3,114.125
STB4: U082.6 U1514.7 | length 85.7
  Top Layer w0.254: 259.05,109.975 259.15,109.875 ; U082.6@291.493,109.743 U082.6@291.493,110.307
  Top Layer w0.5: 259.05,109.975 v1(259.05,116.5) ; v1@259.075,124.05 259.075,124.25 259.075,147.975 262.782,151.682 U1514.7@262.782,159.129 ; 259.112,109.887 259.137,109.863 261.55,107.45 289.2,107.45 U082.6@291.493,109.743
  Bottom Layer w0.254: v1(259.05,116.5) v1@259.075,116.525
  Bottom Layer w0.5: v1@259.075,116.525 v1@259.075,124.05
  other v1: 259.025,124.25
STB4P: U1.2 U082.4 U082.5 | length 73.9
  Top Layer w0.5: U1.2@350.775,113.95 350.775,114.095 v2@350.775,118.1
  Bottom Layer w0.254: U082.5@288.982,110.307 289.075,110.4 U082.5@289.075,110.65
  Bottom Layer w0.5: U082.4@286.413,110.307 U082.5@288.953,110.307 ; U082.5@289.075,110.65 290.725,112.3 313.7,112.3 321.175,119.775 350.125,119.775 350.762,119.138 350.762,118.112 v2@350.8,118.075
  other v2: 350.75,118.1
STB5: U082.3 U1515.7 | length 139
  Top Layer w0.5: v2@182.125,134.35 182.125,134.425 182.125,146.65 186.375,150.9 186.375,159.129 U1515.7@186.375,159.2
  Bottom Layer w0.5: v2@182.05,134.5 182.225,134.5 209.45,134.5 230.225,113.725 281.4,113.725 283.873,111.252 U082.3@283.873,110.307
  other v2: 182.225,134.425
STB5P: U1.3 U082.1 U082.2 | length 79.9
  Top Layer w0.5: v1@347.6,117.725 v1(347.675,117.725) 348.85,117.725 349.5,117.075 349.5,114.095 U1.3@349.5,114.05
  Bottom Layer w0.254: U082.2@281.093,110.307 U082.2@281.15,110.25
  Bottom Layer w0.5: U082.1@278.793,110.307 U082.2@281.093,110.307 ; U082.2@281.333,110.307 281.333,109.442 283.35,107.425 313.525,107.425 323.825,117.725 v1(347.675,117.725) v1@347.725,117.725
TH1: Q1.2 R1511.1 U1.11 | length 175.6
  Top Layer w0.5: U1.11@339.3,114 339.3,114.095 339.3,130.65 ; 339.325,130.7 340.45,131.825 v1@343.225,131.825
  Bottom Layer w0.254: R1511.1@478.925,139.575 R1511.1@478.968,139.619
  Bottom Layer w0.5: v1@343.225,131.825 343.275,131.825 432.8,131.825 440.55,139.575 R1511.1@478.925,139.575 ; R1511.1@478.969,139.619 482.95,143.6 Q1.2@492.925,143.6
  other v1: 343.275,131.8
TH2: Q2.2 R1513.1 U1.12 | length 102.5
  Top Layer w0.254: R1513.1@404.176,139.651 R1513.1@404.768,139.651
  Top Layer w0.5: U1.12@338.102,114.095 338.125,132.15 338.125,132.95 338.5,133.325 v1@339.425,133.325
  Bottom Layer w0.5: v1@339.5,133.3 369.75,133.3 376.075,139.625 404.768,139.625 R1513.1@404.85,139.625 ; R1513.1@404.65,139.775 408.5,143.625 Q2.2@416.7,143.625
  other v1: 339.45,133.35
TH3: Q3.2 R1515.1 U1.13 | length 46.6
  Top Layer w0.5: U1.13@336.832,114.095 336.832,135.432 341.3,139.9 Q3.2@341.3,142.925
  Bottom Layer w0.5: R1515.1@327.675,138.15 332.7,143.175 341.308,143.175 Q3.2@341.5,143.175
TH4: Q4.2 R1517.1 U1.14 | length 107.1
  Top Layer w0.5: v1@312.75,139.25 315.675,139.25 335.562,119.363 U1.14@335.562,114.095
  Bottom Layer w0.254: R1517.1@248.275,138.65 248.282,138.657 253.252,143.627 Q4.2@262.568,143.627
  Bottom Layer w0.5: Q4.2@262.175,143.75 262.568,143.75 311.65,143.75 312.675,142.725 312.675,139.3 312.675,139.275 v1@312.7,139.25
  other v1: 312.7,139.3
TH5: Q5.2 R1519.1 U1.15 | length 184.2
  Top Layer w0.5: v1@312.188,134.813 312.3,134.7 332.65,114.35 332.65,109.825 335.612,106.863 U1.15@335.612,105.263
  Bottom Layer w0.5: R1519.1@172.2,138.575 176.236,142.611 Q5.2@186.368,142.611 ; Q5.2@186.35,142.4 186.368,142.4 226.675,142.4 234.425,134.65 v1@312.225,134.65
  other v1: 312.3,134.7
TX: DTX.2 U1.17 UART.1 | length 24.3
  Top Layer w0.5: UART.1@332.375,90.7 332.375,94.075 338.102,99.802 U1.17@338.102,104.995
  Bottom Layer w0.5: DTX.2@324.726,90.424 UART.1@332.312,90.424
VCC: C1P.1 C081.1 C082.1 C1511.1 C1512.1 C1513.1 C1514.1 C1515.1 P031.9 P032.9 P033.9 P034.9 P035.9 POWER.1 Rp2.1 Rx21.2 U081.14 U082.14 U1511.16 U1512.16 U1513.16 U1514.16 U1515.16 U28031.10 U28032.10 U28033.10 U28034.10 U28035.10 | length 958.1
  Top Layer w0.254: C081.1@273.761,118.711 273.825,118.775 273.85,118.8 273.851,118.801 C081.1@273.9,118.85 ; U082.14@278.626,118.149 278.813,117.963 278.82,117.955 U082.14@278.85,117.925 ; P031.9@478.85,175.55 P031.9@478.936,175.636
  Top Layer w0.5: POWER.1@143.175,118.711 POWER.1@143.256,118.711 ; C081.1@273.75,118.9 C081.1@273.812,118.84 273.85,118.8 C081.1@273.851,118.801 ; U082.14@278.793,117.95 U082.14@278.8,117.95
  Top Layer w1: POWER.1@143.256,118.711 151.5,118.711 249.025,118.711 ; C081.1@273.675,118.775 273.812,118.775 273.825,118.775 277.968,118.775 U082.14@278.793,117.95 ; C081.1@273.761,118.711 249.025,118.711 ; Rx21.2@303.356,96.012 252.013,96.012 249.025,99 249.025,118.711
  Bottom Layer w0.254: POWER.1@143.225,118.725 POWER.1@143.225,118.792 ; C1P.1@151.5,118.75 C1P.1@151.55,118.7 ; C1515.1@164.484,169.1 C1515.1@164.55,169.1 ; P035.9@171.15,175.675 P035.9@171.325,175.5 ; P034.9@247.796,175.679 P034.9@247.8,175.675 ; U082.14@278.7,117.85 278.7,117.927 U082.14@278.7,118.225 ; U1513.16@326.375,166.825 U1513.16@326.536,166.986 ; U081.14@393.373,117.927 U081.14@394.109,117.927 ; U1512.16@401.925,166.65 401.999,166.724 U1512.16@402.275,167 ; U28032.10@402.25,182.425 U28032.10@402.275,182.4 ; U28032.10@402.25,182.775 402.378,182.647 U28032.10@402.4,182.625 ; 402.25,185.175 402.325,185.25 ; P031.9@478.8,175.5 P031.9@478.925,175.625 ; U28031.10@478.925,182.175 479.091,182.341 U28031.10@479.125,182.375 ; 515.6,127.775 515.6,127.8 ; 516.675,185.275 516.725,185.275 ; 518.175,130.3 518.175,130.425 ; 518.297,183.65 518.297,183.653
  Bottom Layer w0.5: POWER.1@143.225,118.792 143.225,125.325 142.6,125.95 142.6,165.925 145.775,169.1 C1515.1@164.484,169.1 ; C1P.1@151.5,118.75 151.487,118.808 151.475,118.861 C1P.1@151.5,118.811 Rp2.1@151.5,121.971 ; C1515.1@164.525,169.1 171.3,169.1 ; U28035.10@171.1,182.475 171.105,182.48 U28035.10@171.15,182.525 ; P035.9@171.15,175.675 171.15,182.497 U28035.10@171.15,182.525 ; U1515.16@171.325,166.749 P035.9@171.325,175.5 ; C1514.1@241.2,168.4 247.775,168.4 ; U28034.10@247.7,182.497 247.7,185.25 ; U1514.16@247.796,166.921 P034.9@247.796,175.639 ; P034.9@247.796,175.679 U28034.10@247.796,182.497 ; C1513.1@319.932,168.559 326.441,168.559 ; U1513.16@326.536,166.986 P033.9@326.536,175.639 U28033.10@326.536,182.497 ; U28033.10@326.55,182.525 326.55,185.25 ; U081.14@394.125,118.075 394.125,127.175 394.725,127.775 416.475,127.775 ; C1512.1@395.624,168.051 402.275,168.051 ; U28032.10@402.25,182.775 402.25,185.175 ; U1512.16@402.275,167 402.275,168.051 ; U28032.10@402.275,182.4 402.275,175.639 402.275,168.051 ; 402.301,168.051 402.275,168.051 ; 404.3,185.225 478.95,185.225 U28031.10@478.95,182.725 ; 404.3,185.25 402.325,185.25 326.55,185.25 ; C082.1@416.475,118.125 416.475,127.775 ; C1511.1@471.824,168.559 478.791,168.559 ; 478.75,185.275 516.675,185.275 518.297,183.653 ; U1511.16@478.8,166.975 P031.9@478.8,175.5 ; P031.9@478.925,175.625 478.925,175.639 U28031.10@478.925,182.175 ; 515.6,127.775 416.475,127.775 ; 515.625,127.75 518.175,130.3 518.35,130.475 ; U28035.10@171.15,182.525 171.15,184.575 171.825,185.25 247.7,185.25 ; 247.7,185.25 326.55,185.25
  Bottom Layer w0.53: 518.35,130.475 518.35,183.525
pads on no net: U1.4 U1.5 U1.6 U1.7 U1.16 U1511.6 U1512.6 U1513.6 U1514.6 U1515.6

## Polygon pours and split planes (outlines as drawn)
GND on Top Layer "Top Layer-GND" (solid, pour order 1000): 135.475,246.45 535.45,246.45 535.45,81.7 135.475,81.7
GND on Bottom Layer "Bottom Layer-GND" (solid, pour order 1001): 135.175,246 535.075,246 535.075,82 135.175,82

## Silkscreen, mask and mechanical layers (free items; w line width, h text height)
Top Overlay:
  region: 368.425,88.912 366.975,88.112 366.975,89.687
  text "+5" at 135.775,118.7 h1.52
  text "GND" at 136,113.425 h1.52
  text "+3" at 136.075,107.85 h1.52
  text "Nguyen Dinh Cuong" at 170.5,106.275 h8
  text "email:nguyendinhcuong7hua@gmail.com" at 170.4,99.6 h6
  text "Mobile: 0979 158 098" at 170.6,91.925 h6
  text "GND" at 335.375,83.6 h1.52
  text "TX" at 330.35,83.525 h1.52
  text "RX" at 341.475,83.525 h1.52